# Allegro board A527-REF-DDR4-16X2-S8L-V2-0.brd
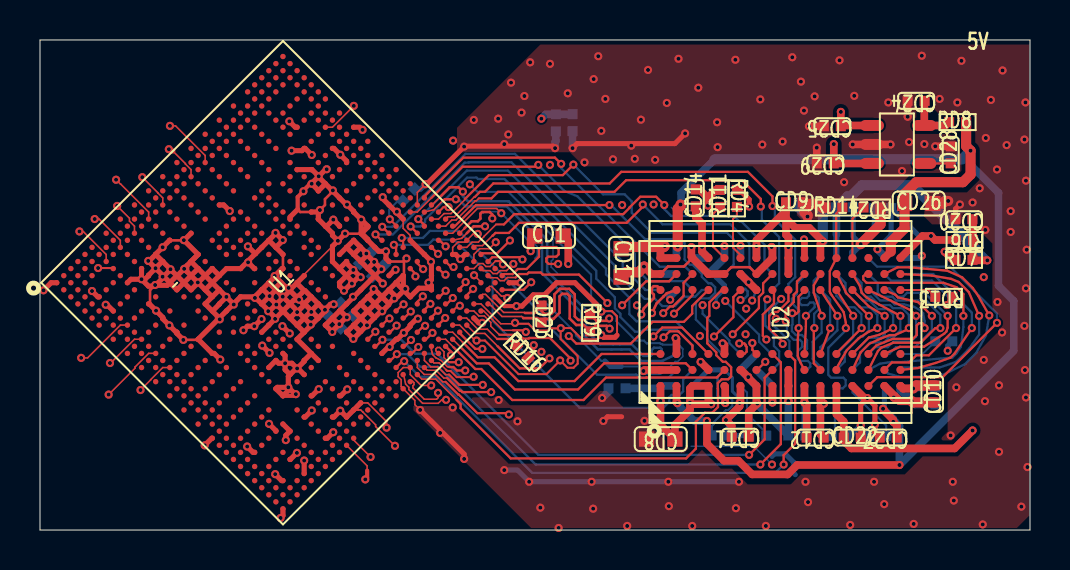
[diagram p0: board, top side]
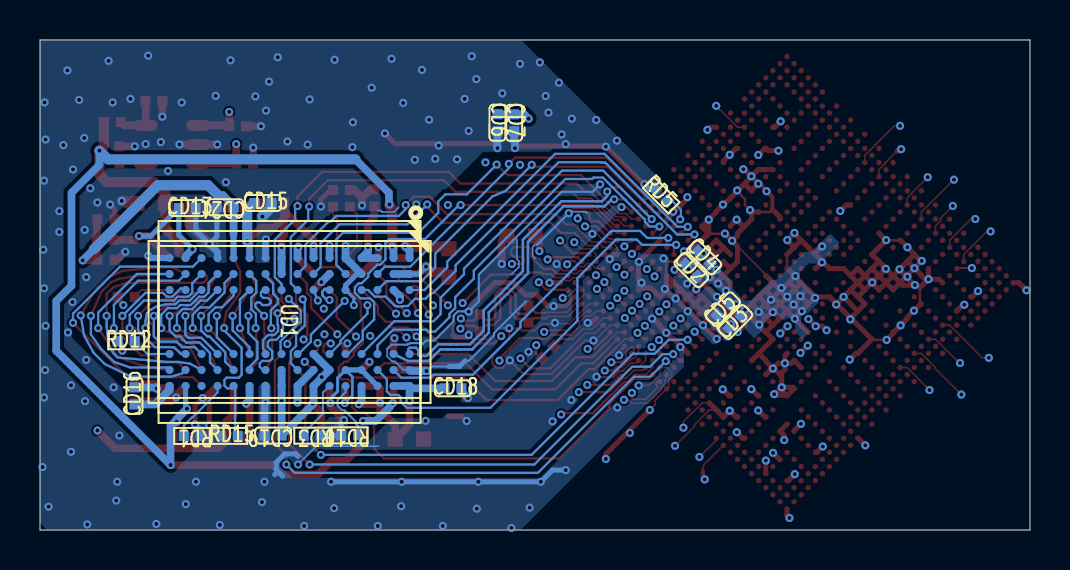
[diagram p1: board, bottom side, seen from below]

Outline 49.5 x 24.51 mm; copper layers: TOP, L2GND, L3, L4, L5GND, L6, L7GND, BOTTOM. Coordinates in mm from the lower left corner of the outline.
Outline path: 0,24.51 0,0 49.5,0 49.5,24.51 0,24.51

## Design rules (mm)
net group SBG1: nets SBG1 SBG1/GND
nets with their own width: min track width 0.102; nets SDQM0

## Placement (name value [footprint] x y rotation side)
CD1  10uF  [C0603]  25.45 14.71 0 top
CD2  2.2uF  [C0402]  16.93 12.99 225 bottom
CD3  2.2uF  [C0402]  14.74 10.41 135 bottom
CD4  2.2uF  [C0402]  16.29 13.63 225 bottom
CD5  2.2uF  [C0402]  15.35 11.04 135 bottom
CD6  2.2uF  [C0402]  26.63 20.37 270 bottom
CD7  100nF  [C0402]  25.79 20.37 270 bottom
CD8  10uF  [C0603]  31.04 4.55 180 top
CD9  2.2uF  [C0402]  37.73 16.39 0 top
CD10  2.2uF  [C0402]  44.75 6.81 90 top
CD11  4.7uF  [C0402]  35.01 4.67 180 top
CD12  4.7uF  [C0402]  38.76 4.62 180 top
CD13  2.2uF  [C0402]  42.14 16.1 180 bottom
CD14  2.2uF  [C0402]  32.79 16.61 90 top
CD15  NC/100nF  [C0402]  38.35 16.36 180 bottom
CD16  NC/100nF  [C0402]  44.78 6.71 90 bottom
CD17  10uF  [C0603]  29.06 13.36 270 top
CD18  NC/100nF  [C0402]  28.85 7.09 180 bottom
CD19  NC/100nF  [C0402]  37.85 4.72 0 bottom
CD20  100nF  [C0402]  46.2 15.54 180 top
CD21  100nF  [C0402]  40.24 16.14 0 bottom
CD22  2.2uF  [C0402]  40.61 4.62 0 top
CD23  NC/2.2pF  [C0402]  25.08 10.8 270 top
CD24  1uF  [C0402]  43.81 21.47 180 top
CD25  1uF  [C0402]  39.62 20.2 180 top
CD26  10uF  [C0603]  43.94 16.33 0 top
CD27  100nF  [C0402]  42.42 4.62 180 top
CD28  22nF  [C0402]  45.54 18.77 90 top
CD29  NC/100nF  [C0402]  39.27 18.34 180 top
NOREF  -  []  49.5 0 90 top
NOREF#2  -  []  0 24.51 0 top
RD1  1K  [R0402]  41.89 4.71 0 bottom
RD2  1K  [R0402]  41.61 16.13 180 top
RD3  240R-1%  [R0402]  35.89 4.72 0 bottom
RD4  240R-1%  [R0402]  34.85 16.59 270 top
RD5  120R-1%  [R0402]  18.44 16.75 225 bottom
RD6  2K-1%  [R0402]  46.23 14.51 180 top
RD7  2K-1%  [R0402]  46.2 13.51 0 top
RD8  0.01R-1%  [R0402]  45.88 20.4 0 top
RD9  100R  [R0402]  27.51 10.36 270 top
RD10  0R  [R0402]  34.02 4.73 0 bottom
RD11  0R  [R0402]  34.01 16.59 90 top
RD12  NC/0R  [R0402]  45.19 9.44 180 bottom
RD13  NC/0R  [R0402]  45.2 11.66 180 top
RD14  0R  [R0402]  39.7 16.13 0 top
RD15  0R  [R0402]  40.04 4.71 180 bottom
RD16  NC/0R  [R0402]  24.12 8.9 315 top
U1  A527  [BGA664P50B1700_1700H180]  12.15 12.37 45 top
UD1  DDR4-FBGA96  [BGA96P80B1000_1400H120]  37.03 10.41 270 bottom
UD2  DDR4-FBGA96  [BGA96P80B1000_1400H120]  37.03 10.41 90 top
UD3  BL9193-2.5BA  [SOT23-5]  42.85 19.29 0 top

## Library data of the parts
CD1-CD29 = C-C0402
RD1-RD15 = R-R0402-1%
RD16 = R-R0402-1%: signal model: R-R0402-1%_R0402_NC/0R_NC/0R
U1 = A527
UD1 UD2 = DDR4-FBGA96
UD3 = RT9050_0

## Footprints (pads in the part's own frame, mm; a bottom-side part is the same pattern mirrored in y, then rotated)
BGA96P80B1000_1400H120
  round 0.4 smd: A1(-3.2,6) A2(-2.4,6) A3(-1.6,6) A7(1.6,6) A8(2.4,6) A9(3.2,6) B1(-3.2,5.2) B2(-2.4,5.2) B3(-1.6,5.2) B7(1.6,5.2) B8(2.4,5.2) B9(3.2,5.2) C1(-3.2,4.4) C2(-2.4,4.4) C3(-1.6,4.4) C7(1.6,4.4) C8(2.4,4.4) C9(3.2,4.4) D1(-3.2,3.6) D2(-2.4,3.6) D3(-1.6,3.6) D7(1.6,3.6) D8(2.4,3.6) D9(3.2,3.6) E1(-3.2,2.8) E2(-2.4,2.8) E3(-1.6,2.8) E7(1.6,2.8) E8(2.4,2.8) E9(3.2,2.8) F1(-3.2,2) F2(-2.4,2) F3(-1.6,2) F7(1.6,2) F8(2.4,2) F9(3.2,2) G1(-3.2,1.2) G2(-2.4,1.2) G3(-1.6,1.2) G7(1.6,1.2) G8(2.4,1.2) G9(3.2,1.2) H1(-3.2,0.4) H2(-2.4,0.4) H3(-1.6,0.4) H7(1.6,0.4) H8(2.4,0.4) H9(3.2,0.4) J1(-3.2,-0.4) J2(-2.4,-0.4) J3(-1.6,-0.4) J7(1.6,-0.4) J8(2.4,-0.4) J9(3.2,-0.4) K1(-3.2,-1.2) K2(-2.4,-1.2) K3(-1.6,-1.2) K7(1.6,-1.2) K8(2.4,-1.2) K9(3.2,-1.2) L1(-3.2,-2) L2(-2.4,-2) L3(-1.6,-2) L7(1.6,-2) L8(2.4,-2) L9(3.2,-2) M1(-3.2,-2.8) M2(-2.4,-2.8) M3(-1.6,-2.8) M7(1.6,-2.8) M8(2.4,-2.8) M9(3.2,-2.8) N1(-3.2,-3.6) N2(-2.4,-3.6) N3(-1.6,-3.6) N7(1.6,-3.6) N8(2.4,-3.6) N9(3.2,-3.6) P1(-3.2,-4.4) P2(-2.4,-4.4) P3(-1.6,-4.4) P7(1.6,-4.4) P8(2.4,-4.4) P9(3.2,-4.4) R1(-3.2,-5.2) R2(-2.4,-5.2) R3(-1.6,-5.2) R7(1.6,-5.2) R8(2.4,-5.2) R9(3.2,-5.2) T1(-3.2,-6) T2(-2.4,-6) T3(-1.6,-6) T7(1.6,-6) T8(2.4,-6) T9(3.2,-6)
BGA664P50B1700_1700H180
  round 0.27 smd: A1(-8,8) A2(-7.5,8) A3(-7,8) A4(-6.5,8) A5(-6,8) A6(-5.5,8) A8(-4.5,8) A10(-3.5,8) A12(-2.5,8) A14(-1.5,8) A16(-0.5,8) A18(0.5,8) A20(1.5,8) A22(2.5,8) A24(3.5,8) A26(4.5,8) A28(5.5,8) A29(6,8) A30(6.5,8) A31(7,8) A32(7.5,8) A33(8,8) AA1(-8,-2) AA2(-7.5,-2) AA3(-7,-2) AA4(-6.5,-2) AA5(-6,-2) AA6(-5.5,-2) AA7(-5,-2) AA9(-4,-2) AA12(-2.5,-2) AA13(-2,-2) AA15(-1,-2) AA16(-0.5,-2) AA18(0.5,-2) AA19(1,-2) AA21(2,-2) AA22(2.5,-2) AA24(3.5,-2) AA26(4.5,-2) AA27(5,-2) AA28(5.5,-2) AA29(6,-2) AA30(6.5,-2) AA31(7,-2) AA32(7.5,-2) AA33(8,-2) AB2(-7.5,-2.5) AB3(-7,-2.5) AB9(-4,-2.5) AB10(-3.5,-2.5) AB11(-3,-2.5) AB12(-2.5,-2.5) AB13(-2,-2.5) AB14(-1.5,-2.5) AB15(-1,-2.5) AB17(0,-2.5) AB24(3.5,-2.5) AB32(7.5,-2.5) AB33(8,-2.5) AC1(-8,-3) AC2(-7.5,-3) AC3(-7,-3) AC4(-6.5,-3) AC5(-6,-3) AC6(-5.5,-3) AC7(-5,-3) AC9(-4,-3) AC15(-1,-3) AC17(0,-3) AC18(0.5,-3) AC19(1,-3) AC20(1.5,-3) AC22(2.5,-3) AC24(3.5,-3) AC26(4.5,-3) AC27(5,-3) AC28(5.5,-3) AC29(6,-3) AC30(6.5,-3) AC31(7,-3) AC32(7.5,-3) AC33(8,-3) AD1(-8,-3.5) AD2(-7.5,-3.5) AD9(-4,-3.5) AD11(-3,-3.5) AD13(-2,-3.5) AD14(-1.5,-3.5) AD15(-1,-3.5) AD20(1.5,-3.5) AD21(2,-3.5) AD22(2.5,-3.5) AD25(4,-3.5) AD32(7.5,-3.5) AD33(8,-3.5) AE1(-8,-4) AE2(-7.5,-4) AE3(-7,-4) AE4(-6.5,-4) AE5(-6,-4) AE6(-5.5,-4) AE7(-5,-4) AE9(-4,-4) AE11(-3,-4) AE12(-2.5,-4) AE13(-2,-4) AE14(-1.5,-4) AE16(-0.5,-4) AE18(0.5,-4) AE19(1,-4) AE20(1.5,-4) AE21(2,-4) AE22(2.5,-4) AE23(3,-4) AE24(3.5,-4) AE25(4,-4) AE26(4.5,-4) AE27(5,-4) AE28(5.5,-4) AE29(6,-4) AE30(6.5,-4) AE31(7,-4) AE32(7.5,-4) AE33(8,-4) AF1(-8,-4.5) AF2(-7.5,-4.5) AF32(7.5,-4.5) AF33(8,-4.5) AG1(-8,-5) AG2(-7.5,-5) AG3(-7,-5) AG4(-6.5,-5) AG5(-6,-5) AG6(-5.5,-5) AG7(-5,-5) AG9(-4,-5) AG11(-3,-5) AG13(-2,-5) AG15(-1,-5) AG17(0,-5) AG19(1,-5) AG21(2,-5) AG23(3,-5) AG25(4,-5) AG28(5.5,-5) AG29(6,-5) AG30(6.5,-5) AG31(7,-5) AG32(7.5,-5) AG33(8,-5) AH1(-8,-5.5) AH2(-7.5,-5.5) AH7(-5,-5.5) AH9(-4,-5.5) AH11(-3,-5.5) AH13(-2,-5.5) AH15(-1,-5.5) AH17(0,-5.5) AH19(1,-5.5) AH21(2,-5.5) AH23(3,-5.5) AH25(4,-5.5) AH27(5,-5.5) AH32(7.5,-5.5) AH33(8,-5.5) AJ1(-8,-6) AJ2(-7.5,-6) AJ3(-7,-6) AJ4(-6.5,-6) AJ5(-6,-6) AJ7(-5,-6) AJ9(-4,-6) AJ11(-3,-6) AJ13(-2,-6) AJ15(-1,-6) AJ17(0,-6) AJ19(1,-6) AJ21(2,-6) AJ23(3,-6) AJ25(4,-6) AJ27(5,-6) AJ30(6.5,-6) AJ31(7,-6) AJ32(7.5,-6) AJ33(8,-6) AK1(-8,-6.5) AK2(-7.5,-6.5) AK5(-6,-6.5) AK7(-5,-6.5) AK9(-4,-6.5) AK11(-3,-6.5) AK13(-2,-6.5) AK15(-1,-6.5) AK17(0,-6.5) AK19(1,-6.5) AK21(2,-6.5) AK23(3,-6.5) AK25(4,-6.5) AK27(5,-6.5) AK29(6,-6.5) AK32(7.5,-6.5) AK33(8,-6.5) AL1(-8,-7) AL2(-7.5,-7) AL3(-7,-7) AL5(-6,-7) AL7(-5,-7) AL9(-4,-7) AL11(-3,-7) AL12(-2.5,-7) AL13(-2,-7) AL14(-1.5,-7) AL15(-1,-7) AL16(-0.5,-7) AL17(0,-7) AL19(1,-7) AL21(2,-7) AL23(3,-7) AL25(4,-7) AL27(5,-7) AL29(6,-7) AL31(7,-7) AL32(7.5,-7) AL33(8,-7) AM1(-8,-7.5) AM2(-7.5,-7.5) AM3(-7,-7.5) AM4(-6.5,-7.5) AM5(-6,-7.5) AM6(-5.5,-7.5) AM7(-5,-7.5) AM8(-4.5,-7.5) AM9(-4,-7.5) AM10(-3.5,-7.5) AM11(-3,-7.5) AM12(-2.5,-7.5) AM13(-2,-7.5) AM14(-1.5,-7.5) AM15(-1,-7.5) AM16(-0.5,-7.5) AM17(0,-7.5) AM18(0.5,-7.5) AM19(1,-7.5) AM20(1.5,-7.5) AM21(2,-7.5) AM22(2.5,-7.5) AM23(3,-7.5) AM24(3.5,-7.5) AM25(4,-7.5) AM26(4.5,-7.5) AM27(5,-7.5) AM28(5.5,-7.5) AM29(6,-7.5) AM30(6.5,-7.5) AM31(7,-7.5) AM32(7.5,-7.5) AM33(8,-7.5) AN1(-8,-8) AN2(-7.5,-8) AN3(-7,-8) AN4(-6.5,-8) AN5(-6,-8) AN6(-5.5,-8) AN7(-5,-8) AN8(-4.5,-8) AN9(-4,-8) AN10(-3.5,-8) AN11(-3,-8) AN13(-2,-8) AN15(-1,-8) AN17(0,-8) AN18(0.5,-8) AN19(1,-8) AN20(1.5,-8) AN21(2,-8) AN22(2.5,-8) AN23(3,-8) AN24(3.5,-8) AN25(4,-8) AN26(4.5,-8) AN27(5,-8) AN28(5.5,-8) AN29(6,-8) AN30(6.5,-8) AN31(7,-8) AN32(7.5,-8) AN33(8,-8) B1(-8,7.5) B2(-7.5,7.5) B3(-7,7.5) B4(-6.5,7.5) B5(-6,7.5) B6(-5.5,7.5) B7(-5,7.5) B8(-4.5,7.5) B9(-4,7.5) B10(-3.5,7.5) B11(-3,7.5) B12(-2.5,7.5) B13(-2,7.5) B14(-1.5,7.5) B15(-1,7.5) B16(-0.5,7.5) B17(0,7.5) B18(0.5,7.5) B19(1,7.5) B20(1.5,7.5) B21(2,7.5) B22(2.5,7.5) B23(3,7.5) B24(3.5,7.5) B25(4,7.5) B26(4.5,7.5) B27(5,7.5) B28(5.5,7.5) B29(6,7.5) B30(6.5,7.5) B31(7,7.5) B32(7.5,7.5) B33(8,7.5) C1(-8,7) C2(-7.5,7) C3(-7,7) C4(-6.5,7) C6(-5.5,7) C7(-5,7) C8(-4.5,7) C9(-4,7) C10(-3.5,7) C11(-3,7) C12(-2.5,7) C13(-2,7) C14(-1.5,7) C15(-1,7) C16(-0.5,7) C17(0,7) C18(0.5,7) C19(1,7) C20(1.5,7) C21(2,7) C22(2.5,7) C23(3,7) C24(3.5,7) C25(4,7) C26(4.5,7) C27(5,7) C28(5.5,7) C29(6,7) C30(6.5,7) C31(7,7) C32(7.5,7) C33(8,7) D1(-8,6.5) D2(-7.5,6.5) D6(-5.5,6.5) D8(-4.5,6.5) D10(-3.5,6.5) D12(-2.5,6.5) D14(-1.5,6.5) D16(-0.5,6.5) D18(0.5,6.5) D20(1.5,6.5) D22(2.5,6.5) D24(3.5,6.5) D26(4.5,6.5) D28(5.5,6.5) D32(7.5,6.5) D33(8,6.5) E1(-8,6) E2(-7.5,6) E3(-7,6) E4(-6.5,6) E5(-6,6) E6(-5.5,6) E8(-4.5,6) E10(-3.5,6) E12(-2.5,6) E14(-1.5,6) E16(-0.5,6) E18(0.5,6) E20(1.5,6) E22(2.5,6) E24(3.5,6) E26(4.5,6) E28(5.5,6) E29(6,6) E30(6.5,6) E31(7,6) E32(7.5,6) E33(8,6) F1(-8,5.5) F2(-7.5,5.5) F6(-5.5,5.5) F8(-4.5,5.5) F10(-3.5,5.5) F12(-2.5,5.5) F14(-1.5,5.5) F16(-0.5,5.5) F18(0.5,5.5) F20(1.5,5.5) F22(2.5,5.5) F24(3.5,5.5) F26(4.5,5.5) F28(5.5,5.5) F32(7.5,5.5) F33(8,5.5) G1(-8,5) G2(-7.5,5) G3(-7,5) G4(-6.5,5) G5(-6,5) G6(-5.5,5) G8(-4.5,5) G10(-3.5,5) G12(-2.5,5) G14(-1.5,5) G16(-0.5,5) G18(0.5,5) G20(1.5,5) G22(2.5,5) G24(3.5,5) G26(4.5,5) G28(5.5,5) G29(6,5) G30(6.5,5) G31(7,5) G32(7.5,5) G33(8,5) H2(-7.5,4.5) H3(-7,4.5) H24(3.5,4.5) H31(7,4.5) H32(7.5,4.5) J1(-8,4) J2(-7.5,4) J3(-7,4) J4(-6.5,4) J5(-6,4) J6(-5.5,4) J7(-5,4) J9(-4,4) J10(-3.5,4) J12(-2.5,4) J13(-2,4) J15(-1,4) J16(-0.5,4) J17(0,4) J18(0.5,4) J19(1,4) J21(2,4) J22(2.5,4) J23(3,4) J26(4.5,4) J28(5.5,4) J29(6,4) J30(6.5,4) J31(7,4) J32(7.5,4) J33(8,4) K2(-7.5,3.5) K3(-7,3.5) K9(-4,3.5) K10(-3.5,3.5) K11(-3,3.5) K12(-2.5,3.5) K13(-2,3.5) K15(-1,3.5) K16(-0.5,3.5) K19(1,3.5) K21(2,3.5) K22(2.5,3.5) K24(3.5,3.5) K25(4,3.5) K26(4.5,3.5) K31(7,3.5) K32(7.5,3.5) L1(-8,3) L2(-7.5,3) L3(-7,3) L4(-6.5,3) L5(-6,3) L6(-5.5,3) L7(-5,3) L9(-4,3) L10(-3.5,3) L12(-2.5,3) L13(-2,3) L15(-1,3) L16(-0.5,3) L17(0,3) L18(0.5,3) L19(1,3) L21(2,3) L22(2.5,3) L24(3.5,3) L26(4.5,3) L27(5,3) L28(5.5,3) L29(6,3) L30(6.5,3) L31(7,3) L32(7.5,3) L33(8,3) M2(-7.5,2.5) M3(-7,2.5) M10(-3.5,2.5) M13(-2,2.5) M16(-0.5,2.5) M18(0.5,2.5) M19(1,2.5) M21(2,2.5) M22(2.5,2.5) M31(7,2.5) M32(7.5,2.5) N1(-8,2) N2(-7.5,2) N3(-7,2) N4(-6.5,2) N5(-6,2) N6(-5.5,2) N7(-5,2) N9(-4,2) N10(-3.5,2) N12(-2.5,2) N13(-2,2) N15(-1,2) N18(0.5,2) N19(1,2) N21(2,2) N22(2.5,2) N24(3.5,2) N26(4.5,2) N27(5,2) N28(5.5,2) N29(6,2) N30(6.5,2) N31(7,2) N32(7.5,2) N33(8,2) P2(-7.5,1.5) P3(-7,1.5) P9(-4,1.5) P11(-3,1.5) P13(-2,1.5) P16(-0.5,1.5) P18(0.5,1.5) P19(1,1.5) P21(2,1.5) P22(2.5,1.5) P24(3.5,1.5) P31(7,1.5) P32(7.5,1.5) R1(-8,1) R2(-7.5,1) R3(-7,1) R4(-6.5,1) R5(-6,1) R6(-5.5,1) R7(-5,1) R11(-3,1) R13(-2,1) R15(-1,1) R17(0,1) R18(0.5,1) R19(1,1) R22(2.5,1) R24(3.5,1) R26(4.5,1) R27(5,1) R28(5.5,1) R29(6,1) R30(6.5,1) R31(7,1) R32(7.5,1) R33(8,1) T2(-7.5,0.5) T3(-7,0.5) T9(-4,0.5) T11(-3,0.5) T13(-2,0.5) T15(-1,0.5) T16(-0.5,0.5) T18(0.5,0.5) T19(1,0.5) T21(2,0.5) T22(2.5,0.5) T24(3.5,0.5) T31(7,0.5) T32(7.5,0.5) U1(-8,0) U2(-7.5,0) U3(-7,0) U4(-6.5,0) U5(-6,0) U6(-5.5,0) U7(-5,0) U8(-4.5,0) U10(-3.5,0) U12(-2.5,0) U13(-2,0) U14(-1.5,0) U16(-0.5,0) U18(0.5,0) U19(1,0) U21(2,0) U22(2.5,0) U25(4,0) U26(4.5,0) U27(5,0) U28(5.5,0) U29(6,0) U30(6.5,0) U31(7,0) U32(7.5,0) U33(8,0) V2(-7.5,-0.5) V3(-7,-0.5) V18(0.5,-0.5) V19(1,-0.5) V31(7,-0.5) V32(7.5,-0.5) W1(-8,-1) W2(-7.5,-1) W3(-7,-1) W4(-6.5,-1) W5(-6,-1) W6(-5.5,-1) W7(-5,-1) W9(-4,-1) W10(-3.5,-1) W12(-2.5,-1) W13(-2,-1) W15(-1,-1) W16(-0.5,-1) W19(1,-1) W21(2,-1) W22(2.5,-1) W23(3,-1) W24(3.5,-1) W25(4,-1) W27(5,-1) W28(5.5,-1) W29(6,-1) W30(6.5,-1) W31(7,-1) W32(7.5,-1) W33(8,-1) Y2(-7.5,-1.5) Y3(-7,-1.5) Y9(-4,-1.5) Y10(-3.5,-1.5) Y12(-2.5,-1.5) Y13(-2,-1.5) Y15(-1,-1.5) Y18(0.5,-1.5) Y19(1,-1.5) Y21(2,-1.5) Y22(2.5,-1.5) Y23(3,-1.5) Y24(3.5,-1.5) Y26(4.5,-1.5) Y31(7,-1.5) Y32(7.5,-1.5)
C0402
  rect 0.5x0.5 smd: 1(-0.425,0) 2(0.425,0)
C0603
  rect 0.76x0.76 smd: 1(-0.71,0) 2(0.71,0)
R0402
  rect 0.5x0.5 smd: 1(-0.425,0) 2(0.425,0)
SOT23-5
  oval 1.2x0.55 smd: 1(-1.246,0.95) 2(-1.246,0) 3(-1.246,-0.95) 4(1.373,-0.95) 5(1.373,0.95)

## Nets
GND: CD1.2 CD2.2 CD3.2 CD4.2 CD5.2 CD6.2 CD7.2 CD8.2 CD9.2 CD10.2 CD11.2 CD12.2 CD13.2 CD14.2 CD15.2 CD16.2 CD17.2 CD18.2 CD19.2 CD20.2 CD21.2 CD22.2 CD24.2 CD25.2 CD26.2 CD27.2 CD28.2 CD29.2 RD1.1 RD2.1 RD3.1 RD4.1 RD5.1 RD7.1 RD10.2 RD11.2 RD12.1 RD13.1 RD14.1 RD15.1 U1.A1(GND0) U1.AA15(GND87) U1.AA16(GND88) U1.AA18(GND89) U1.AA21(GND90) U1.AA22(GND91) U1.AA26(GND92) U1.AA30(GND93) U1.AA32(GND94) U1.AB10(GND95) U1.AB11(GND96) U1.AB12(GND97) U1.AB14(GND98) U1.AB15(GND99) U1.AB17(GND100) U1.AC1(GND101) U1.AC26(GND102) U1.AC29(GND103) U1.AC33(GND104) U1.AD9(GND105) U1.AD11(GND106) U1.AD13(GND107) U1.AD14(GND108) U1.AD20(GND109) U1.AD21(GND110) U1.AD22(GND111) U1.AE9(GND112) U1.AE12(GND113) U1.AE14(GND114) U1.AE18(GND115) U1.AE19(GND116) U1.AE20(GND117) U1.AE21(GND118) U1.AE22(GND119) U1.AE23(GND120) U1.AE24(GND121) U1.AE25(GND122) U1.AE26(GND123) U1.AE29(GND124) U1.AE32(GND125) U1.AG3(GND126) U1.AG6(GND127) U1.AG7(GND128) U1.AG11(GND129) U1.AG25(GND130) U1.AG28(GND131) U1.AG31(GND132) U1.AG33(GND133) U1.AH7(GND134) U1.AH9(GND135) U1.AH27(GND136) U1.AH32(GND137) U1.AJ13(GND138) U1.AJ19(GND139) U1.AJ21(GND140) U1.AJ23(GND141) U1.AK5(GND142) U1.AK11(GND143) U1.AK32(GND144) U1.AL3(GND145) U1.AL9(GND146) U1.AL12(GND147) U1.AL13(GND148) U1.AL14(GND149) U1.AM5(GND150) U1.AM20(GND151) U1.AM26(GND152) U1.AM29(GND153) U1.AN1(GND154) U1.AN10(GND155) U1.AN11(GND156) U1.AN18(GND157) U1.AN22(GND158) U1.AN24(GND159) U1.AN28(GND160) U1.AN31(GND161) U1.AN33(GND162) U1.C6(GND1) U1.C8(GND2) U1.C10(GND3) U1.C12(GND4) U1.C14(GND5) U1.C18(GND6) U1.C20(GND7) U1.D6(GND8) U1.E3(GND9) U1.F6(GND10) U1.F8(GND11) U1.F10(GND12) U1.F12(GND13) U1.G3(GND14) U1.G8(GND15) U1.G10(GND16) U1.G14(GND17) U1.G18(GND18) U1.G29(GND19) U1.J3(GND20) U1.J6(GND21) U1.J9(GND22) U1.J10(GND23) U1.J12(GND24) U1.J13(GND25) U1.J28(GND26) U1.J31(GND27) U1.K9(GND28) U1.K10(GND29) U1.K11(GND30) U1.K12(GND31) U1.K26(GND32) U1.L3(GND33) U1.L6(GND34) U1.L10(GND35) U1.L12(GND36) U1.L13(GND37) U1.L27(GND38) U1.L30(GND39) U1.L33(GND40) U1.M13(GND41) U1.N3(GND42) U1.N6(GND43) U1.N10(GND44) U1.N12(GND45) U1.N15(GND46) U1.N18(GND47) U1.N19(GND48) U1.N22(GND49) U1.N26(GND50) U1.N27(GND51) U1.N30(GND52) U1.P11(GND53) U1.P16(GND54) U1.P19(GND55) U1.P24(GND56) U1.R3(GND57) U1.R7(GND58) U1.R11(GND59) U1.R13(GND60) U1.R19(GND61) U1.R24(GND62) U1.R27(GND63) U1.T15(GND64) U1.T16(GND65) U1.T18(GND66) U1.T24(GND67) U1.U7(GND68) U1.U14(GND69) U1.U16(GND70) U1.U25(GND71) U1.U27(GND72) U1.V18(GND73) U1.V19(GND74) U1.W12(GND75) U1.W13(GND76) U1.W15(GND77) U1.W16(GND78) U1.W22(GND79) U1.W27(GND80) U1.W30(GND81) U1.Y15(GND82) U1.Y18(GND83) U1.Y22(GND84) U1.Y23(GND85) U1.Y26(GND86) UD1.A2(VSSQ1) UD1.A8(VSSQ2) UD1.B2(VSS1) UD1.C9(VSSQ3) UD1.D2(VSSQ4) UD1.D8(VSSQ5) UD1.E1(VSS2) UD1.E3(VSSQ6) UD1.E8(VSSQ7) UD1.F1(VSSQ8) UD1.G8(VSS4) UD1.H1(VSSQ9) UD1.H9(VSSQ10) UD1.K1(VSS5) UD1.K9(VSS6) UD1.N1(VSS8) UD1.T1(VSS9) UD2.A2(VSSQ1) UD2.A8(VSSQ2) UD2.B2(VSS1) UD2.C9(VSSQ3) UD2.D2(VSSQ4) UD2.D8(VSSQ5) UD2.E1(VSS2) UD2.E3(VSSQ6) UD2.E8(VSSQ7) UD2.F1(VSSQ8) UD2.G8(VSS4) UD2.H1(VSSQ9) UD2.H9(VSSQ10) UD2.K1(VSS5) UD2.K9(VSS6) UD2.N1(VSS8) UD2.T1(VSS9) UD3.2(GND)
SBG1/GND: RD14.2 RD15.2 RD16.2 UD1.M9(VSS7) UD2.M9(VSS7)
VCC25-DRAM: CD26.1 CD27.1 RD8.2 UD1.B1(VPP1) UD1.R9(VPP2) UD2.B1(VPP1) UD2.R9(VPP2)
VCC-DRAM: CD1.1 CD2.1 CD3.1 CD4.1 CD5.1 CD8.1 CD9.1 CD10.1 CD11.1 CD12.1 CD13.1 CD14.1 CD15.1 CD16.1 CD17.1 CD18.1 CD19.1 RD6.2 U1.AA24(VCC-DRAM4) U1.AB24(VCC-DRAM5) U1.AC17(VCC-DRAML0) U1.AC18(VCC-DRAML1) U1.AC19(VCC-DRAML2) U1.AC20(VCC-DRAML3) U1.AC22(VCC-DRAML4) U1.AC24(VCC-DRAM6) U1.W23(VCC-DRAM0) U1.W24(VCC-DRAM1) U1.W25(VCC-DRAM2) U1.Y24(VCC-DRAM3) UD1.A1(VDDQ1) UD1.A9(VDDQ2) UD1.B3(VDD1) UD1.B9(VDD2) UD1.C1(VDDQ3) UD1.D1(VDD3) UD1.D9(VDDQ4) UD1.F2(VDDQ5) UD1.F8(VDDQ6) UD1.G1(VDDQ7) UD1.G7(VDD4) UD1.G9(VDDQ8) UD1.J1(VDD5) UD1.J2(VDDQ9) UD1.J8(VDDQ10) UD1.J9(VDD6) UD1.L1(VDD7) UD1.L9(VDD8) UD1.R1(VDD9) UD1.T9(VDD10) UD2.A1(VDDQ1) UD2.A9(VDDQ2) UD2.B3(VDD1) UD2.B9(VDD2) UD2.C1(VDDQ3) UD2.D1(VDD3) UD2.D9(VDDQ4) UD2.F2(VDDQ5) UD2.F8(VDDQ6) UD2.G1(VDDQ7) UD2.G7(VDD4) UD2.G9(VDDQ8) UD2.J1(VDD5) UD2.J2(VDDQ9) UD2.J8(VDDQ10) UD2.J9(VDD6) UD2.L1(VDD7) UD2.L9(VDD8) UD2.R1(VDD9) UD2.T9(VDD10)
VDD18-DRAM: CD6.1 CD7.1 U1.AD25(VDD18-DRAM)
717-BLDO2: CD29.1 UD3.3(EN)
PS: CD25.1 UD3.1(VIN)
SA0: U1.AL31(SA12) UD1.P3(A0) UD2.P3(A0)
SA1: U1.AJ31(SA9) UD1.P7(A1) UD2.P7(A1)
SA2: U1.AK33(SA0) UD1.R3(A2) UD2.R3(A2)
SA3: U1.AL27(SA3) UD1.N7(A3) UD2.N7(A3)
SA4: U1.AH25(SA4) UD1.N3(A4) UD2.N3(A4)
SA5: U1.AJ25(SBA1) UD1.P8(A5) UD2.P8(A5)
SA6: U1.AN26(SBG0) UD1.P2(A6) UD2.P2(A6)
SA7: U1.AJ32(SA11) UD1.R8(A7) UD2.R8(A7)
SA8: U1.AL25(SA8) UD1.R2(A8) UD2.R2(A8)
SA9: U1.AG29(SA10) UD1.R7(A9) UD2.R7(A9)
SA10: U1.AK29(SA13) UD1.M3(A10) UD2.M3(A10)
SA11: U1.AJ33(SA2) UD1.T2(A11) UD2.T2(A11)
SA12: U1.AM33(SA7) UD1.M7(A12) UD2.M7(A12)
SA13: U1.AG30(SA1) UD1.T8(A13) UD2.T8(A13)
SACT: U1.AL29(SACT) UD1.L3(ACT) UD2.L3(ACT)
SBA0: U1.AK25(SBA0) UD1.N2(BA0) UD2.N2(BA0)
SBA1: U1.AK27(SA5) UD1.N8(BA1) UD2.N8(BA1)
SBG0: U1.AN27(SA6) UD1.M2(BG0) UD2.M2(BG0)
SBG1: RD16.1 U1.AM27(SBG1)
SCAS: U1.AM28(SA14) UD1.M8(A15/CAS) UD2.M8(A15/CAS)
SCKE0: U1.AM31(SCKE0) UD1.K2(CKE0) UD2.K2(CKE0)
SCKN: CD23.2 RD9.2 U1.AN30(SCKN) UD1.K8(CK#) UD2.K8(CK#)
SCKP: CD23.1 RD9.1 U1.AM30(SCKP) UD1.K7(CK) UD2.K7(CK)
SCS0: U1.AN32(SCS0) UD1.L7(CS0) UD2.L7(CS0)
SDQ0: U1.AE28(SDQ0) UD1.J7(DQ7)
SDQ1: U1.AE27(SDQ1) UD1.F7(DQ1)
SDQ2: U1.AG32(SDQ2) UD1.H2(DQ4)
SDQ3: U1.AH33(SDQ3) UD1.G2(DQ0)
SDQ4: U1.AE30(SDQ4) UD1.H8(DQ5)
SDQ5: U1.AD32(SDQ5) UD1.H3(DQ2)
SDQ6: U1.AE31(SDQ6) UD1.H7(DQ3)
SDQ7: U1.AD33(SDQ7) UD1.J3(DQ6)
SDQ8: U1.AC27(SDQ8) UD1.C8(DQ13)
SDQ9: U1.AC28(SDQ9) UD1.B8(DQ9)
SDQ10: U1.AC30(SDQ10) UD1.C7(DQ11)
SDQ11: U1.AC31(SDQ11) UD1.D7(DQ15)
SDQ12: U1.AA33(SDQ12) UD1.C2(DQ12)
SDQ13: U1.AA31(SDQ13) UD1.C3(DQ10)
SDQ14: U1.AA28(SDQ14) UD1.A3(DQ8)
SDQ15: U1.AA27(SDQ15) UD1.D3(DQ14)
SDQ16: U1.AM25(SDQ16) UD2.A3(DQ8)
SDQ17: U1.AN25(SDQ17) UD2.C2(DQ12)
SDQ18: U1.AH23(SDQ18) UD2.C7(DQ11)
SDQ19: U1.AK23(SDQ19) UD2.C8(DQ13)
SDQ20: U1.AL23(SDQ20) UD2.B8(DQ9)
SDQ21: U1.AM22(SDQ21) UD2.D3(DQ14)
SDQ22: U1.AN21(SDQ22) UD2.C3(DQ10)
SDQ23: U1.AG21(SDQ23) UD2.D7(DQ15)
SDQ24: U1.AG19(SDQ24) UD2.J7(DQ7)
SDQ25: U1.AH19(SDQ25) UD2.H2(DQ4)
SDQ26: U1.AK19(SDQ26) UD2.H3(DQ2)
SDQ27: U1.AL19(SDQ27) UD2.J3(DQ6)
SDQ28: U1.AM21(SDQ28) UD2.H8(DQ5)
SDQ29: U1.AL21(SDQ29) UD2.G2(DQ0)
SDQ30: U1.AK21(SDQ30) UD2.F7(DQ1)
SDQ31: U1.AH21(SDQ31) UD2.H7(DQ3)
SDQM0: U1.AE33(SDQM0) UD1.E7(DM0)
SDQM1: U1.AC32(SDQM1) UD1.E2(DM1)
SDQM2: U1.AM24(SDQM2) UD2.E2(DM1)
SDQM3: U1.AN20(SDQM3) UD2.E7(DM0)
SDQS0N: U1.AF33(SDQS0N) UD1.F3(DQS0#)
SDQS0P: U1.AF32(SDQS0P) UD1.G3(DQS0)
SDQS1N: U1.AB33(SDQS1N) UD1.A7(DQS1#)
SDQS1P: U1.AB32(SDQS1P) UD1.B7(DQS1)
SDQS2N: U1.AN23(SDQS2N) UD2.A7(DQS1#)
SDQS2P: U1.AM23(SDQS2P) UD2.B7(DQS1)
SDQS3N: U1.AN19(SDQS3N) UD2.F3(DQS0#)
SDQS3P: U1.AM19(SDQS3P) UD2.G3(DQS0)
SODT0: U1.AL32(SODT0) UD1.K3(ODT0) UD2.K3(ODT0)
SRAS: U1.AJ27(SA16) UD1.L8(A16/RAS) UD2.L8(A16/RAS)
SRST: U1.AG23(SRST) UD1.P1(RESET) UD2.P1(RESET)
STEN1: RD1.2 UD1.N9(TEN)
STEN2: RD2.2 UD2.N9(TEN)
SVREF: CD20.1 CD21.1 CD22.1 RD6.1 RD7.2 UD1.M1(VREFCA) UD2.M1(VREFCA)
SWE: U1.AN29(SA15) UD1.L2(A14/WE) UD2.L2(A14/WE)
N186294: RD5.2 U1.AA29(SZQ)
N16583990: CD28.1 UD3.4(BP)
N16583994: CD24.1 RD8.1 UD3.5(VOUT)
N16584336: RD10.1 UD1.E9(VSS3)
N16584348: RD11.1 UD2.E9(VSS3)
N16584564: RD12.2 UD1.T7(NC)
N16584572: RD13.2 UD2.T7(NC)
N16584986: RD3.2 UD1.F9(ZQ)
N16585660: RD4.2 UD2.F9(ZQ)

Pads without a net: U1 A2 A3 A4 A5 A6 A8 A10 A12 A14 A16 A18 A20 A22 A24 A26 A28 A29 A30 A31 A32 A33 AA1 AA2 AA3 AA4 AA5 AA6 AA7 AA9 AA12 AA13 AA19 AB2 AB3 AB9 AB13 AC2 AC3 AC4 AC5 AC6 AC7 AC9 AC15 AD1 AD2 AD15 AE1 AE2 AE3 AE4 AE5 AE6 AE7 AE11 AE13 AE16 AF1 AF2 AG1 AG2 AG4 AG5 AG9 AG13 AG15 AG17 AH1 AH2 AH11 AH13 AH15 AH17 AJ1 AJ2 AJ3 AJ4 AJ5 AJ7 AJ9 AJ11 AJ15 AJ17 AJ30 AK1 AK2 AK7 AK9 AK13 AK15 AK17 AL1 AL2 AL5 AL7 AL11 AL15 AL16 AL17 AL33 AM1 AM2 AM3 AM4 AM6 AM7 AM8 AM9 AM10 AM11 AM12 AM13 AM14 AM15 AM16 AM17 AM18 AM32 AN2 AN3 AN4 AN5 AN6 AN7 AN8 AN9 AN13 AN15 AN17 B1 B2 B3 B4 B5 B6 B7 B8 B9 B10 B11 B12 B13 B14 B15 B16 B17 B18 B19 B20 B21 B22 B23 B24 B25 B26 B27 B28 B29 B30 B31 B32 B33 C1 C2 C3 C4 C7 C9 C11 C13 C15 C16 C17 C19 C21 C22 C23 C24 C25 C26 C27 C28 C29 C30 C31 C32 C33 D1 D2 D8 D10 D12 D14 D16 D18 D20 D22 D24 D26 D28 D32 D33 E1 E2 E4 E5 E6 E8 E10 E12 E14 E16 E18 E20 E22 E24 E26 E28 E29 E30 E31 E32 E33 F1 F2 F14 F16 F18 F20 F22 F24 F26 F28 F32 F33 G1 G2 G4 G5 G6 G12 G16 G20 G22 G24 G26 G28 G30 G31 G32 G33 H2 H3 H24 H31 H32 J1 J2 J4 J5 J7 J15 J16 J17 J18 J19 J21 J22 J23 J26 J29 J30 J32 J33 K2 K3 K13 K15 K16 K19 K21 K22 K24 K25 K31 K32 L1 L2 L4 L5 L7 L9 L15 L16 L17 L18 L19 L21 L22 L24 L26 L28 L29 L31 L32 M2 M3 M10 M16 M18 M19 M21 M22 M31 M32 N1 N2 N4 N5 N7 N9 N13 N21 N24 N28 N29 N31 N32 N33 P2 P3 P9 P13 P18 P21 P22 P31 P32 R1 R2 R4 R5 R6 R15 R17 R18 R22 R26 R28 R29 R30 R31 R32 R33 T2 T3 T9 T11 T13 T19 T21 T22 T31 T32 U1 U2 U3 U4 U5 U6 U8 U10 U12 U13 U18 U19 U21 U22 U26 U28 U29 U30 U31 U32 U33 V2 V3 V31 V32 W1 W2 W3 W4 W5 W6 W7 W9 W10 W19 W21 W28 W29 W31 W32 W33 Y2 Y3 Y9 Y10 Y12 Y13 Y19 Y21 Y31 Y32; UD1 P9 T3; UD2 P9 T3

## Via types
v1: diameter 0.406, hole 0.203, TOP to BOTTOM, 453 vias

## Routing (per net, layer and track width the routed paths; a pad name or vN(x,y) marks a point on that pad's centre or on a via; arc(x,y) is an arc through that point)
GND: length 447.9
  TOP w0.076: U1.AL14 16.39,6.36 17.33,5.42 v1(17.33,5.12) ; U1.V19 13.21,12.78 14.62,14.19 ; 16.36,2.97 16.36,3.21 U1.AN10 ; v1(19.56,7.23) 19.06,7.23 18.51,7.77 U1.AM20 18.16,8.13 17.91,7.88 17.91,7.67 18.06,7.52 18.06,7.17 U1.AN18 18.75,6.48 18.75,6.27 v1(19.01,6) ; v1(16.53,3.65) 15.68,4.5 U1.AN11 ; v1(3.8,17.52) 4.03,17.3 4.04,17.3 5.43,15.9 U1.C12 ; v1(3.5,8.35) 3.54,8.35 4.72,9.54 U1.L3 ; v1(3.86,16.21) 4.47,15.59 4.47,15.45 4.72,15.2 U1.C10 ; 15.93,6.01 16.04,6.01 16.14,5.9 16.78,5.26 16.78,5.17 17.75,4.21 ; v1(21.83,9.48) 21.76,9.48 20.99,10.25 U1.AM26 ; 23.87,10.35 23.84,10.32 23.04,10.32 22.05,11.31 U1.AM29 ; v1(2.06,8.61) 2.38,8.61 4.02,10.25 U1.J3 ; U1.AA32 18.87,16.89 v1(19.28,17.3) ; v1(1.97,14.94) 1.99,14.92 2.18,14.92 3.31,13.78 U1.C6 ; v1(5.03,7) 5.53,7.51 5.53,7.52 6.14,8.13 U1.R3 ; v1(23.67,13.31) 23.33,12.97 23,12.97 22.86,12.83 22.65,12.83 22.51,12.97 22.15,12.97 U1.AK32 ; U1.AE32 20.64,14.84 21.88,16.08 22.83,16.08 v1(23.07,15.85) ; v1(5.12,17.65) 5.89,16.87 5.89,16.86 6.14,16.61 U1.C14 ; U1.J31 14.62,20.15 v1(15.69,21.22) ; 16,20.15 v1(16.13,20.02) ; U1.C18 7.55,18.03 7.27,18.31 7.27,18.33 6.64,18.96 ; U1.C8 4.02,14.49 2.95,15.56 v1(2.73,15.56) ; U1.AC29 18.51,14.74 18.16,15.09 U1.AA30 ; 20.31,8.01 19.96,8.36 19.7,8.36 U1.AN22 ; 20.63,13.78 20.63,14.14 20.89,14.39 20.94,14.4 21.25,14.4 U1.AG33 21.66,14.81 v1(21.89,14.81) ; U1.C20 8.26,18.73 6.78,20.22 v1(6.5,20.22) ; v1(3.43,6.77) 4.75,8.09 4.75,8.15 5.43,8.83 U1.N3
  TOP w0.102: v1(28.07,9.75) 27.85,9.54 27.11,9.54 26.55,10.1 26.05,10.1 26.03,10.08 ; 20.31,8.01 20.36,7.96 20.53,7.96 20.84,7.65 21.67,7.65 v1(21.68,7.66) ; v1(26.04,10.09) 26.03,10.09 26.03,10.08 ; v1(2.91,13.1) 3.64,13.1 U1.D6 ; 13.54,5.98 v1(13.59,5.98) ; 28.16,10.95 28.59,10.95 28.85,10.69 28.85,9.74 ; 26.03,10.08 26.03,9.55 26.89,8.7 26.89,8.32 26.68,8.12 26.38,8.12 v1(26.01,8.48) 25.32,7.8 23.93,7.8 22.25,9.48 v1(21.83,9.48) ; 26.03,10.08 26.03,10.09 25.51,10.09 25.4,9.97 24.77,9.97 24.43,10.32 23.91,10.32 23.86,10.36 v1(23.75,10.36) ; U1.F10 5.46,13.46 ; U1.AC33 20.17,16.15 v1(20.43,16.15) ; U1.AL13 15.93,6.01
  TOP w0.114: 17.75,4.21 v1(17.75,4.21)
  TOP w0.127: 18.2,13.46 18.17,13.43 17.45,13.43 ; 18.2,13.46 v1(18.33,13.59) ; 18.2,13.46 18.2,12.76 U1.AE26 ; U1.F12 7.19,14.49 v1(7.19,14.5) ; 16.06,14.82 15.26,14.82 v1(15.25,14.83) ; UD2.A8 31.4,13.18 32.2,13.18 UD2.C9 ; v1(20.55,8.74) 20.55,8.92 U1.AN24 ; 14.64,16.95 14.25,16.55 14.25,16.26 v1(14,16.01) ; UD2.G8 35.49,13.15 34.57,13.15 UD2.E8 ; v1(7.17,9.51) 7.88,9.51 7.91,9.54 ; 5.7,12.2 5.5,12 5.5,11.38 U1.J6 ; U1.T18 U1.R19 ; 12.88,16.03 13.01,15.91 U1.P24
  TOP w0.203: v1(12.79,6.8) 12.71,6.71 U1.AE9 ; 16.36,2.97 16.36,2.63 v1(16.27,2.53) ; v1(23.83,11.2) 23.22,11.2 U1.AN31 ; 13.49,17.3 13.17,16.98 v1(13.17,16.95) 12.88,16.66 12.88,16.03
  TOP w0.254: 12.88,16.03 12.5,15.65 U1.N22 ; 29.08,5.67 28.38,5.67 v1(28.17,5.45) ; U1.AE22 U1.AE23 ; U1.AE22 U1.AD22 ; U1.AE22 U1.AE21 ; U1.AE22 v1(17.11,10.94) ; U1.AE23 17.45,12.02 ; U1.AE23 17.44,11.32 ; U1.AE23 16.71,12.05 v1(16.69,12.05) 16.66,12.02 16.66,11.93 U1.AD22 ; 13.49,17.3 13.51,17.32 v1(13.58,17.32) ; U1.F10 5.79,13.8 v1(6.13,14.14) 6.48,14.49 U1.F12 ; U1.F10 U1.G10 ; U1.F10 5.46,13.46 v1(5.41,13.46) v1(5.78,13.1) ; U1.AA18 13.61,11 13.61,10.93 ; U1.AA18 U1.Y18 ; U1.AA18 14.21,11.02 v1(14.25,11.02) ; U1.AH32 21.25,13.78 v1(21.02,13.55) 20.78,13.78 20.63,13.78 ; v1(12.96,11.52) 12.94,11.5 12.7,11.5 U1.W16 ; v1(12.96,11.52) 12.43,12.04 v1(12.43,12.11) ; v1(12.96,11.52) 12.96,11.72 13.21,11.98 ; v1(12.96,11.52) 13.13,11.35 13.25,11.35 ; U1.AA15 U1.AB15 ; U1.AA15 U1.Y15 ; U1.AA15 U1.AA16 ; U1.AB15 13.54,10.22 v1(13.54,10.27) ; U1.AB15 U1.AB14 U1.AD14 ; U1.J10 U1.J9 ; U1.J10 6.87,12.72 v1(7.21,13.06) ; U1.J10 6.53,13.03 ; U1.J10 U1.K10 ; U1.J9 6.49,12.38 6.2,12.67 ; U1.J9 U1.K9 U1.K10 ; U1.J9 6.36,12.24 5.77,12.24 v1(5.76,12.25) ; v1(10.17,9.99) 10.37,10.19 v1(10.72,10.19) v1(11.08,10.55) ; v1(21.21,3.56) 21.21,3.8 20.15,4.86 v1(20.01,4.86) 20.01,5 v1(19.01,6) ; U1.Y18 13.25,11.98 13.21,11.98 ; U1.Y18 13.25,11.35 ; 7.91,13.78 v1(7.19,14.5) 7.21,14.5 U1.G14 ; 7.91,13.78 U1.J12 ; 7.91,13.78 U1.J13 U1.J12 ; v1(46,16.28) 45.78,16.06 CD20.2 ; U1.AK11 14.7,5.65 v1(15.01,5.97) U1.AL12 U1.AL13 U1.AL14 ; v1(12.26,8.34) 11.94,8.34 U1.AB11 U1.AB10 ; v1(12.26,8.34) 12.26,8.02 U1.AD11 ; v1(12.26,8.34) 12.6,8.34 v1(12.86,8.08) ; v1(12.26,8.34) 12.26,8.73 U1.AB12 ; 13.61,10.93 13.25,11.29 ; 13.61,10.93 13.54,10.93 U1.AA16 ; 13.61,10.93 13.61,10.91 U1.AB17 ; v1(14.25,11.02) 14.52,11.29 v1(14.69,11.29) ; v1(14.25,11.02) 14.25,10.93 U1.AB17 ; v1(12.86,8.08) 13.21,8.43 U1.AD13 U1.AD14 ; v1(12.86,8.08) 12.9,8.04 12.95,8.04 U1.AE12 ; v1(12.86,8.08) 12.81,8.04 12.77,8.04 U1.AD11 ; U1.N19 U1.N18 10.77,13.82 10.76,13.82 ; U1.N19 U1.P19 ; U1.N19 11.78,14.83 v1(11.78,14.86) v1(12.14,14.5) 12.14,14.48 U1.P19 ; U1.J6 5.47,11.31 v1(5.8,10.97) 6.14,10.64 U1.L6 6.14,10.56 v1(6.47,10.24) 6.81,9.89 U1.N6 6.85,9.83 v1(7.17,9.51) ; U1.AG3 10.65,3.88 v1(10.36,4.18) ; v1(18.26,12.06) 18.26,12.05 18.22,12.01 ; v1(18.26,12.06) 18.17,12.16 18.17,12.71 U1.AE26 U1.AE25 ; v1(18.26,12.06) 18.11,12.06 U1.AE25 ; 11.78,10.58 v1(11.76,10.56) U1.W13 11.09,9.89 ; 11.78,10.58 11.78,10.61 11.45,10.93 ; 11.78,10.58 U1.W15 ; v1(10.41,13.39) 10.72,13.08 U1.P16 ; v1(10.41,13.39) 10.41,13.46 10.76,13.82 ; v1(10.41,13.39) 10.34,13.39 U1.N15 9.32,13.08 U1.M13 ; 17.45,12.02 U1.AE25 ; 17.45,12.02 17.72,11.75 v1(17.72,11.58) ; U1.W27 v1(16.06,15.53) ; U1.W27 16.06,14.87 ; U1.W27 16.39,15.15 16.06,14.82 ; v1(16.06,15.53) 16.06,14.87 ; v1(16.06,15.53) U1.U27 15.68,15.95 v1(15.35,16.28) 15.31,16.28 U1.R27 14.64,16.95 v1(14.64,16.99) 14.6,16.99 U1.N27 ; 12.17,11.65 12.17,11.64 U1.W16 ; 12.17,11.65 12.16,11.65 v1(12.14,11.67) U1.U16 ; 12.17,11.65 11.84,11.32 11.84,11.3 v1(11.82,11.28) 11.81,11.27 11.79,11.27 11.45,10.93 ; 12.17,11.65 12.53,12.01 ; v1(12.85,3.86) 12.52,3.53 U1.AK5 ; U1.L30 14.7,19.09 v1(15.01,18.77) 15.33,18.45 U1.N30 ; U1.G10 v1(6.53,13.04) ; U1.G10 6.11,13.43 v1(5.78,13.1) ; 10.76,13.82 10.76,13.82 v1(10.4,14.19) ; v1(15.6,12.33) 15.56,12.33 v1(15.2,11.97) 14.98,12.19 U1.AA21 U1.AA22 ; v1(15.6,12.33) 15.6,12.46 U1.AA22 ; v1(15.6,12.33) 15.91,12.65 v1(16.03,12.65) v1(15.67,13.01) ; U1.AC29 U1.AE29 19.55,13.45 v1(19.55,13.42) 19.57,13.4 U1.AG28 19.57,12.52 v1(19.43,12.37) 19.57,12.22 U1.AH27 19.5,12.09 18.95,12.09 U1.AG25 18.22,11.96 18.22,12.01 ; v1(12.12,10.2) v1(12.49,9.83) ; U1.U16 11.8,12.13 12.05,12.39 ; U1.U16 U1.T16 ; U1.U16 v1(11.48,11.7) ; v1(12.43,12.11) 12.33,12.11 12.05,12.39 ; v1(12.43,12.11) 12.53,12.01 ; 7.53,12.74 U1.K11 v1(7.89,12.38) 7.91,12.37 ; 7.53,12.74 7.57,12.74 U1.K12 ; 7.53,12.74 7.53,12.74 ; U1.E3 2.89,11.66 v1(2.6,11.95) ; 7.91,12.37 8.26,12.02 8.26,12.01 ; 7.91,12.37 U1.L10 U1.K10 ; 7.91,12.37 U1.L12 ; U1.AE19 U1.AE18 v1(15.67,9.56) 16.05,9.94 ; U1.AE19 U1.AE20 ; U1.AE19 16,9.94 16.05,9.94 ; U1.AD14 U1.AE14 ; U1.AA22 15.6,12.99 15.65,12.99 v1(15.67,13.01) ; U1.AA22 U1.Y22 ; U1.T16 11.8,12.73 11.8,12.74 12.14,13.08 ; U1.T16 11.09,12.02 ; v1(11.76,2.79) 12.08,2.47 U1.AL3 ; 16.73,10.62 16.4,10.29 16.35,10.29 ; 16.73,10.62 16.73,10.62 U1.AE21 ; 16.73,10.62 17.05,10.94 v1(17.11,10.94) ; U1.U25 14.98,15.21 v1(14.67,15.53) 14.34,15.2 U1.T24 ; v1(12.42,7.14) 12.42,7.69 U1.AD11 ; v1(12.42,7.14) 11.87,7.14 U1.AD9 U1.AE9 12.42,6.98 v1(12.42,7.14) ; v1(12.42,7.14) 12.76,6.8 v1(12.79,6.8) ; v1(25.76,19.1) 25.65,19.2 21.23,19.2 v1(21.21,19.18) 19.33,17.3 v1(19.28,17.3) ; v1(28.07,9.75) 28.18,9.64 28.75,9.64 28.85,9.74 ; U1.N27 U1.N26 13.92,16.99 v1(13.58,17.32) ; U1.N27 13.94,17.65 v1(13.94,17.69) ; U1.AG7 U1.AH7 12.29,4.73 v1(12.29,4.5) ; 16.35,10.29 v1(16.35,10.24) 16.05,9.94 ; 16.35,10.29 U1.AE20 ; v1(15.67,13.01) 15.33,13.35 U1.Y23 U1.Y22 ; 7.91,9.54 8.87,10.5 8.87,10.7 8.62,10.95 ; 8.62,10.95 8.97,11.3 U1.P11 v1(9.32,11.66) ; 8.62,10.95 U1.N10 8.61,11.66 ; U1.A1 0.56,12.37 v1(0.18,11.99) ; 13.21,11.98 12.86,12.33 U1.V18 ; 8.61,11.66 8.62,11.66 U1.N12 ; 8.61,11.66 8.26,12.01 ; 6.17,12.67 v1(6.13,12.67) 6.13,12.74 v1(5.78,13.1) ; 6.17,12.67 6.2,12.67 ; 6.17,12.67 6.53,13.03 ; U1.AE20 U1.AE21 ; U1.AE20 U1.AD20 U1.AD21 ; U1.L12 U1.K12 ; U1.L12 8.61,12.37 ; U1.L12 8.61,13.08 ; U1.K12 U1.J12 ; 7.53,12.74 7.53,12.74 7.34,12.94 7.34,13.22 U1.J12 ; 7.53,12.74 7.53,12.7 U1.K10 ; U1.Y22 U1.W22 14.62,14.19 v1(14.9,14.47) ; v1(18.9,10.57) 18.84,10.57 U1.AJ23 18.51,10.19 v1(18.19,9.86) 17.87,9.54 U1.AJ21 17.48,9.22 v1(17.48,9.16) 17.42,9.16 U1.AJ19 ; U1.Y15 12.83,10.93 12.89,10.93 ; U1.Y15 U1.W15 ; 17.44,11.32 17.44,11.27 v1(17.11,10.94) ; 17.44,11.32 17.44,11.33 17.7,11.58 v1(17.72,11.58) ; v1(13.94,17.69) 13.6,18.03 U1.L27 12.86,18.03 U1.K26 ; v1(13.94,17.69) 14.29,18.05 v1(14.33,18.05) ; v1(13.94,17.69) 13.58,17.34 v1(13.58,17.32) ; v1(8.99,10.54) 8.99,10.62 U1.R11 9.64,11.28 v1(9.69,11.28) ; v1(17.72,11.58) 17.82,11.68 17.89,11.68 18.22,12.01 ; v1(9.32,11.66) 9.67,11.31 U1.R13 10.69,11.66 v1(10.75,11.61) ; v1(9.32,11.66) U1.N12 ; U1.V19 12.53,12.05 12.53,12.01 ; 16.06,14.87 16.06,14.82 ; 16.06,14.87 16.39,14.54 U1.Y26 ; 16.06,14.82 U1.Y26 ; 8.26,12.01 8.61,12.37 ; v1(5.78,13.1) 5.43,12.75 U1.G8 5.25,12.54 v1(5.08,12.54) ; U1.AN1 12.15,0.72 v1(12.03,0.6) ; 8.61,12.37 U1.N12 ; 8.61,12.37 U1.M13 ; U1.L13 8.61,13.08 ; 8.61,13.08 U1.M13 ; U1.P19 U1.R19 ; 13.92,15.93 U1.R24 U1.T24 ; 13.92,15.93 13.9,15.91 U1.P24 ; 13.92,15.93 v1(14,16.01) 13.94,15.94 13.92,15.93 ; 6.2,12.67 5.83,12.29 5.79,12.29 v1(5.76,12.25) ; U1.G3 3.35,11.27 v1(3.29,11.27) ; U1.AD21 U1.AE21 ; U1.AD21 U1.AD22 ; v1(35.46,16.18) 35.46,16.54 34.98,17.01 RD4.1 ; v1(5.76,12.25) 5.7,12.2 5.42,12.2 v1(5.08,12.54) ; v1(32.26,19.84) 31.75,19.33 26.86,19.33 v1(26.63,19.1) ; U1.AA16 12.89,10.92 12.89,10.93 ; U1.AA16 v1(13.54,10.27) ; U1.W16 U1.W15 ; U1.W16 12.51,11.31 12.89,10.93 ; U1.W15 11.52,11.59 11.52,11.66 v1(11.48,11.7) ; 13.25,11.35 13.25,11.29 ; U1.Y26 U1.AA26 16.94,13.94 v1(17.3,13.94) 17.3,13.58 17.45,13.43 ; 13.25,11.29 12.89,10.93 ; U1.AM5 v1(13.21,3.47) ; v1(45.34,11.25) 45.62,11.54 RD13.1 ; v1(5.08,12.54) 5.08,13.08 U1.F8 ; v1(5.08,12.54) 5.07,12.54 4.54,12.54 U1.F6 ; v1(9.01,8.53) 8.71,8.83 U1.U7 U1.R7 ; 6.53,13.03 v1(6.53,13.04) ; 6.53,13.03 v1(6.53,13.04) ; v1(13.59,18.76) 13.26,19.09 U1.J28 13.1,18.97 v1(12.58,18.97) ; U1.G29 12.77,20.15 v1(12.47,20.44) ; v1(15.25,14.83) 14.9,14.47 v1(14.9,14.47) ; v1(9.49,15.96) 9.19,16.26 U1.G18 ; 6.64,18.96 6.53,18.96 v1(6.44,19.05) ; 12.14,13.08 12.11,13.08 v1(11.73,12.71) 12.05,12.39 ; 12.14,13.08 U1.T18 ; 11.09,11.31 10.79,11.61 v1(10.75,11.61) ; 11.09,11.31 v1(11.48,11.7) ; 11.09,11.31 11.41,10.99 v1(11.41,10.95) 11.42,10.93 11.45,10.93 ; U1.AG11 13.6,6.71 v1(13.94,7.05) ; U1.T24 14.62,14.84 14.62,14.74 v1(14.9,14.47) ; 11.09,12.02 11.17,12.02 v1(11.48,11.7) ; 11.09,12.02 10.75,11.67 v1(10.75,11.61) ; v1(13.54,10.27) 13.59,10.27 U1.AB17 ; v1(17.14,16.65) 17.14,16.58 17.79,15.92 v1(17.84,15.92) 17.84,15.87 U1.AA30 ; v1(11.45,5.31) 11.8,4.97 U1.AG6 ; U1.AL9 14.36,4.59 v1(14.66,4.89) ; CD27.2 41.75,4.87 v1(41.75,5.28) 41.75,6.22 v1(41.37,6.6) 41.04,6.27 v1(41.04,5.23) CD22.2 ; v1(23.83,11.2) 24.1,11.2 24.66,11.76 25.22,11.76 25.83,12.37 26.75,12.37 27.99,11.13 27.99,11 v1(28.07,10.92) 28.1,10.95 28.16,10.95 ; U1.L33 16,20.15 ; U1.AN28 21.93,10.36 v1(22.11,10.36) ; 13.54,5.98 v1(13.59,5.98) 13.26,5.65 U1.AH9 ; v1(11.11,9.22) v1(11.48,8.86) ; U1.AC1 8.59,4.59 v1(8.24,4.24) ; v1(24.03,12.37) 23.46,12.37 U1.AN33 ; v1(15.36,7.04) 15.04,6.71 U1.AJ13
  TOP w0.33: v1(38.2,14.53) 38.23,14.51 UD2.K9
  TOP w0.381: 33.4,16.61 v1(33.4,16.23) ; 33.4,16.61 33,17.01 32.82,17.01 CD14.2 ; 33.4,16.61 33.4,16.63 33.78,17.01 RD11.2 ; v1(42.53,19.29) UD3.2 v1(40.64,19.29) ; v1(34.26,6.35) 34.26,7.17 UD2.E1 ; UD2.N1 41.23,6.6 v1(41.37,6.6) ; UD2.B2 UD2.A2 30.23,8.01 v1(30.18,7.95) ; UD2.G8 UD2.H9 36.63,14.12 v1(36.58,14.16) ; CD1.2 26.42,14.45 v1(26.42,13.31) ; v1(34.13,9.34) 34.23,9.25 UD2.E3 ; 30.21,13.17 30.58,12.81 UD2.A8 ; CD29.2 v1(38.84,19.13) ; UD2.E8 UD2.D8 UD2.C9 32.57,13.66 v1(32.57,14.15) ; v1(45.24,13.92) 45.64,13.51 RD7.1 ; UD2.K1 v1(38.23,6.38) 38.34,6.27 CD12.2 ; CD24.2 v1(43.39,20.67) ; UD2.D2 33.43,8.02 v1(33.03,8.41) ; CD25.2 v1(38.45,20.2) ; CD28.2 v1(44.76,19.19) ; UD2.F1 35.03,6.39 v1(34.99,6.36) 34.99,6.19 v1(34.3,5.5) 34.59,5.21 CD11.2 ; UD2.H1 v1(36.63,6.38)
  TOP w0.4: v1(43.66,7.08) 43.15,7.08 UD2.T1
  TOP w0.508: RD2.1 42.03,15.29 v1(41.04,14.3) ; CD17.2 29.3,12.89 29.93,12.89 30.21,13.17 30.21,13.17 v1(30.2,13.17) ; 38.23,16.32 38.23,15.9 38.38,15.75 v1(38.38,15.68) ; 38.23,16.32 38.93,16.32 39.12,16.13 RD14.1 ; 38.23,16.32 CD9.2 ; v1(45.42,16.46) 45.26,16.46 45.14,16.33 CD26.2 ; v1(43.66,7.08) 43.81,7.23 CD10.2
  L2GND w0.076: 37.97,10.95 37.94,10.71 37.8,10.46 ; 17.42,12.88 17.42,13.31
  L3 w0.076: v1(17.48,9.16) 17.48,8.68 18.14,8.03 18.14,6.88 v1(19.01,6)
  L3 w0.254: v1(24.22,21.71) v1(23.55,22.38) 21.69,20.52 v1(21.69,20.51) 20.66,19.48 v1(20.66,19.48) 17.84,16.67 v1(17.84,15.92) ; v1(23.22,3) 23.14,2.92 21.84,2.92 v1(21.21,3.56) 21.21,3.58 20.08,4.71 20.08,4.79 v1(20.01,4.86) 19.01,5.86 v1(19.01,6)
  L5GND w0.076: 17.45,12.9 17.42,13.44 ; 38,10.92 37.9,10.54
  L5GND w0.381: v1(17.84,15.92) 17.84,16.67 v1(20.66,19.48) 20.66,19.48 v1(21.69,20.51) 21.69,20.52 v1(23.55,22.38) v1(24.22,21.71) 24.72,21.71 27.17,19.27 27.17,6.95 v1(23.22,3) 23.29,2.92 23.49,2.92 ; 16.3,8.71 v1(19.01,6) 19.04,6 20.01,5.04 v1(20.01,4.86) 20.08,4.93 21.21,3.8 v1(21.21,3.56) 21.45,3.56 22.09,2.92
  L7GND w0.076: 17.42,12.88 17.42,13.26 ; 38,10.9 37.9,10.57
  BOTTOM w0.076: 31.57,16.13 31.79,15.91 32.39,15.91 32.46,15.98 32.61,15.98 ; 32.14,9.06 32.14,8.68 31.9,8.43 31.77,8.43 31.34,8.01 UD2.A2 ; 24.74,13.59 24.87,13.72 24.87,14.17 24.75,14.29 ; v1(23.07,15.85) 22.99,15.93 22.23,15.93 22.15,15.85 22.15,15.85 ; v1(36.6,3.28) 35.69,4.19 32.56,4.19 ; 25.93,12.8 25.91,12.8 25.57,13.14 25.57,13.45 25.65,13.54 25.65,14.53
  BOTTOM w0.102: 28.24,8.46 28.07,8.46 26.8,9.73 26.8,9.85 25.21,11.44 ; v1(21.5,17.29) 21.87,16.92 23.42,16.92 27.56,12.78 27.56,11.43 v1(28.07,10.92) 28.08,10.94 28.61,10.94 28.82,10.73 28.82,10.45 29.79,9.47 30.2,9.47 30.35,9.32 30.38,9.35 31,9.35 31.04,9.31 31.09,9.31 31.13,9.27 31.93,9.27 32.14,9.06 ; 29.06,8.18 29.95,8.18 30.18,7.95 ; v1(23.07,15.85) 24.63,14.28 24.67,14.28
  BOTTOM w0.127: v1(34.26,6.35) 33.89,6.73 33.89,7.67 UD1.E8
  BOTTOM w0.152: UD1.E3 33.81,11.59 v1(33.81,11.25) ; UD1.E8 34.62,7.61 34.62,6.94 34.99,6.57 v1(34.99,6.36)
  BOTTOM w0.254: 28.24,8.46 28.52,8.18 29.06,8.18 ; UD1.E8 UD2.D2 UD1.C9 ; v1(23.22,3) 23.88,3 v1(24.46,2.41) v1(27.58,2.41) v1(31.42,2.41) v1(34.95,2.41) ; RD1.1 41.46,5 v1(41.75,5.28) ; CD13.2 41.71,14.97 v1(41.04,14.3) 40.66,14.67 CD21.2 ; 37.36,2.69 37.69,3.02 37.69,3.38 37.26,3.81 36.73,3.81 36.6,3.68 ; v1(41.04,5.23) 40.52,4.71 RD15.1 ; RD12.1 45.39,9.21 v1(45.39,8.97) ; UD1.E3 34.23,12.24 33.82,12.64 33.82,12.65 33.67,12.81 UD2.D8 ; RD3.1 34.46,4.72 RD10.2 34.44,5.36 v1(34.3,5.5) ; 37.69,2.85 37.77,2.77 ; RD5.1 19.03,17.05 v1(19.28,17.3) ; UD2.A8 30.57,12.81 v1(30.2,13.17)
  BOTTOM w0.305: UD1.T1 43.98,13.61 v1(44.09,13.72) ; v1(38.23,6.38) 38.23,6.74
  BOTTOM w0.33: UD1.N1 40.63,13.89 v1(41.04,14.3) ; UD2.K9 38.23,14.51 v1(38.2,14.53)
  BOTTOM w0.381: UD1.B2 UD2.A8 ; v1(43.66,7.08) 43.71,7.13 CD16.2 ; v1(38.23,6.38) 38.27,6.33 CD19.2 ; v1(25.76,19.1) 25.76,19.41 25.79,19.44 CD7.2 ; UD1.F1 v1(35.03,14.23) ; CD6.2 v1(26.63,19.1) ; UD2.H9 36.63,14.12 v1(36.58,14.16) ; CD18.2 28.43,6.92 v1(28.11,6.6) ; UD1.G8 UD2.H1 v1(36.63,6.38) ; UD2.D8 UD1.E1 v1(34.23,14.21) ; UD2.A2 30.97,7.95 30.18,7.95 v1(30.18,7.95)
  BOTTOM w0.406: 38.23,6.74 UD2.K1
  BOTTOM w0.508: v1(38.38,15.68) 38.38,15.69 37.93,16.14 CD15.2
  vias: v1(12.86,10.9) v1(13.57,10.91) v1(20.64,6.13) v1(22.91,20.57) v1(22.94,6.5) v1(23.22,19.3) v1(23.42,19.79) v1(23.88,5.44) v1(24.08,20.88) v1(24.51,23.39) v1(25.07,8.91) v1(25.02,1.12) v1(25.5,23.32) v1(25.5,18.26) v1(25.93,0.1) v1(26.39,21.84) v1(27.23,18.39) v1(27.69,22.56) v1(27.66,1.07) v1(27.91,23.7) v1(28.07,19.96) v1(28.27,21.56) v1(28.65,18.54) v1(29.11,16.26) v1(29.36,0.2) v1(29.57,19.23) v1(29.74,18.57) v1(29.85,11.24) v1(30.05,20.52) v1(30.23,5.46) v1(30.4,23.01) v1(30.68,16.28) v1(30.76,18.52) v1(31.34,21.36) v1(31.45,1.19) v1(31.93,23.57) v1(32.61,0.2) v1(32.92,22.12) v1(33,9.71) v1(33.86,20.4) v1(33.88,19.15) v1(34.77,23.52) v1(34.8,1.09) v1(35.31,11.07) v1(35.28,9.79) v1(36.02,21.54) v1(36.12,19.28) v1(36.3,0.2) v1(36.8,10.57) v1(37.13,19.43) v1(37.62,23.65) v1(38.05,22.43) v1(38.2,20.98) v1(38.28,2.41) v1(38.4,1.4) v1(38.73,21.69) v1(39.98,23.49) v1(40.21,17.4) v1(40.51,0.25) v1(40.72,21.72) v1(41.71,2.41) v1(42.21,1.3) v1(42.42,21.39) v1(43.1,17.96) v1(43.46,19.41) v1(43.69,0.3) v1(44.09,23.72) v1(44.22,19.3) v1(44.98,21.56) v1(45.54,4.73) v1(45.64,2.41) v1(45.69,1.47) v1(45.87,21.39) v1(45.82,7.14) v1(46.08,23.47) v1(46.63,16.38) v1(46.99,17.09) v1(47.19,12.65) v1(47.19,8.51) v1(47.14,0.28) v1(47.29,19.61) v1(47.27,15.01) v1(47.25,6.44) v1(47.55,21.51) v1(47.85,18.03) v1(47.88,11.4) v1(47.96,7.24) v1(47.96,3.91) v1(48.11,9.88) v1(48.13,22.99) v1(48.34,19.25) v1(48.54,15.95) v1(48.54,14.91) v1(49.07,1.17) v1(49.28,21.39) v1(49.23,19.53) v1(49.3,17.48) v1(49.3,12.09) v1(49.23,10.21) v1(49.25,8) v1(49.3,6.63) v1(49.34,14.02) v1(49.38,3.15)
SBG1/GND: length 31.6
  TOP w0.114: RD14.2 39.81,15.81 39.81,13.62 UD2.M9 39.49,12.94 39.49,11.92 39.53,11.83 39.59,11.74 40.19,10.9 40.3,10.36 v1(40.3,10.1) ; RD16.2 24.47,8.6 24.69,8.81 v1(24.69,9.25)
  L6 w0.114: v1(40.3,10.1) 40.3,9.85 38.49,8.05 31.24,8.05 30.97,8.32 27.3,8.32 26.24,9.37 24.92,9.37 24.8,9.25 v1(24.69,9.25)
  BOTTOM w0.114: RD15.2 39.75,4.85 39.75,7.13 UD1.M9 39.95,7.09 40.14,7.09 40.28,7.23 40.28,7.51 40.17,7.62 39.56,7.62 39.42,7.76 39.42,9.12 40.3,9.99 v1(40.3,10.1)
VCC25-DRAM: length 68.9
  TOP w0.254: 42.19,6.03 42.67,5.55 42.67,5.51
  TOP w0.381: v1(42.16,6.07) 42.19,6.03 42.19,5.99 42.67,5.51 v1(42.67,5.41) 42.84,5.24 CD27.1 ; v1(33.35,5.45) 33.35,4.32 34.2,3.47 34.92,3.47 35.61,2.78 37.39,2.78 37.86,3.25 v1(42.98,3.25) ; UD2.B1 31.83,6.39 v1(31.87,6.34) ; 42.55,13.93 UD2.R9
  TOP w0.508: RD8.2 46.31,19.2 v1(46.53,18.97) 46.53,17.78 46.15,17.4 43.81,17.4 43.23,16.82 CD26.1 43.23,15.09 42.55,14.4 42.55,13.93 ; v1(32.03,16.28) 32.03,16.21 31.89,16.07 v1(31.89,14.18)
  BOTTOM w0.254: v1(42.16,6.07) 42.23,6.14 UD1.R9
  BOTTOM w0.381: UD1.B1 31.83,14.11 31.89,14.17 v1(31.89,14.18) ; v1(33.35,5.45) 32.71,5.45 32.01,6.16 32.01,6.21 v1(31.87,6.34) ; v1(42.16,6.07) 42.67,5.55 v1(42.67,5.41) 42.77,5.41 42.98,5.2 v1(42.98,3.25) 48.69,8.97 48.69,11.46 47.93,12.22 47.93,16.87 46.53,18.26 v1(46.53,18.97) ; v1(32.03,16.28) 32.05,16.31 32.05,16.87 33.73,18.54
  BOTTOM w0.508: 33.73,18.54 46.1,18.54 v1(46.53,18.97)
VCC-DRAM: length 86.7
  TOP w0.203: U1.AC24 v1(17.07,13.05)
  TOP w0.254: 16.71,13.41 16.71,13.39 U1.AB24 ; 16.71,13.41 v1(17.07,13.05) ; 16.71,13.41 v1(16.71,13.41) 16.71,13.41 16.32,13.8 ; U1.W24 U1.W23 ; U1.W24 U1.W25 16.02,14.15 ; U1.W24 U1.Y24 ; U1.AA24 U1.AB24 ; U1.AA24 16.32,13.71 16.32,13.8 ; U1.AA24 U1.Y24 ; U1.AB24 U1.AC24 ; U1.Y24 16.02,14.12 16.02,14.15 ; U1.AC24 v1(17.14,12.33) ; U1.AC24 U1.AC22 15.69,11.66 v1(15.65,11.66) 15.65,11.63 U1.AC20 U1.AC19 ; 16.02,14.15 16.32,13.86 v1(16.32,13.83) 16.32,13.8 ; U1.AC18 14.93,10.3 v1(14.97,10.3) ; U1.AC18 U1.AC19 ; U1.AC18 U1.AC17 14.61,9.91 v1(14.62,9.91) 14.62,9.95 v1(14.97,10.3) ; v1(14.97,10.3) 15.31,10.64 v1(15.34,10.64) 15.03,10.96 U1.AC19
  TOP w0.381: v1(32.5,6.37) 32.5,6.01 31.75,5.26 CD8.1 31.03,5.27 v1(31.03,6.45) UD2.A1 ; v1(32.5,6.37) 32.5,7.08 UD2.C1 UD2.D1 33.43,6.43 v1(33.57,6.29) 32.58,6.29 v1(32.5,6.37) ; UD2.J8 UD2.J9 v1(37.43,14.15) 37.43,14.64 37.31,14.76 37.31,15.58 ; CD11.1 35.44,5.9 v1(35.87,6.33) 35.83,6.37 UD2.G1 35.41,7.62 35.41,7.65 ; UD2.L9 39.03,14.32 v1(39.14,14.44) 38.47,15.11 37.77,15.11 37.31,15.58 ; UD2.L1 39.03,6.49 39.17,6.35 ; CD14.1 32.79,15.64 33.1,15.33 v1(33.1,14.16) 33.1,13.93 UD2.D9 ; 37.31,15.58 37.31,15.97 ; UD2.J2 UD2.J1 37.43,6.45 v1(37.42,6.45) ; CD12.1 39.03,4.78 39.03,6.21 39.17,6.35 ; v1(31.78,9.6) 31.83,9.56 UD2.B3 ; CD1.1 24.53,14.5 v1(24.53,13.95) ; 39.17,6.35 v1(39.2,6.32) ; UD2.G9 v1(35.83,14.2) 35.83,14.49 37.31,15.97 ; 35.41,7.65 35.06,8.01 UD2.F2 ; 35.41,7.65 v1(35.42,7.65) ; CD9.1 37.31,15.97 ; RD6.2 44.75,14.51 v1(44.55,14.71) 44.13,14.71 UD2.T9 ; UD2.G7 35.83,12.01 v1(35.43,12.4) 35.03,12.81 UD2.F8 ; UD2.B9 UD2.A9 31.03,13.98 31.2,14.16
  TOP w0.4: UD2.R1 42.75,6.68 42.75,6.68 ; 42.75,6.68 42.75,6.63 v1(42.69,6.63) ; 42.75,6.68 42.88,6.55 42.88,6.55 42.98,6.45 v1(43.59,6.45)
  TOP w0.508: CD17.1 29.14,14.16 31.2,14.16 v1(31.24,14.2) ; CD10.1 43.66,6.38 v1(43.59,6.45)
  L3 w0.076: 37.95,10.57 37.95,11.2
  BOTTOM w0.254: v1(41.88,14.04) 41.88,14.06 42.56,14.75 CD13.1 43.96,14.71 v1(44.55,14.71)
  BOTTOM w0.305: v1(39.14,14.44) 39.03,14.32 UD2.L9
  BOTTOM w0.381: UD2.A1 30.91,7.09 CD18.1 ; UD2.A1 v1(31.03,6.45) ; UD2.A1 UD1.B9 ; UD2.J8 UD2.J9 v1(37.43,14.15) ; 35.41,7.65 35.41,7.65 35.38,7.65 UD2.F2 UD1.G7 ; 35.41,7.65 v1(35.42,7.65) ; 35.41,7.65 35.41,7.62 UD2.G1 35.83,6.37 v1(35.87,6.33) 35.87,6.28 CD19.1 37.42,6.45 v1(37.42,6.45) 37.43,6.45 UD2.J1 UD2.J2 ; v1(33.57,6.29) 33.43,6.43 UD2.D1 ; UD1.C1 UD2.D9 33.1,13.93 v1(33.1,14.16) ; v1(31.24,14.2) 31.03,13.98 UD2.A9 ; UD2.L1 39.03,6.49 v1(39.2,6.32) ; UD1.R1 42.23,13.7 v1(41.88,14.04) ; v1(35.43,12.4) 35.03,12.81 UD2.F8 ; v1(31.51,11.52) 31.51,11.69 UD1.B3 ; UD2.G9 v1(35.83,14.2) ; CD16.1 43.76,6.28 v1(43.59,6.45)
  BOTTOM w0.406: UD1.T9 43.03,7.01 v1(43.59,6.45)
  BOTTOM w0.508: CD15.1 39.14,15.99 v1(39.14,14.44)
VDD18-DRAM: length 13
  TOP w0.254: v1(17.78,13.02) 17.75,13.02 17.45,12.72
  L6 w0.254: v1(17.78,13.02) 18.4,13.02
  L6 w0.305: 24.36,19.87 24.36,18.98 18.4,13.02
  L6 w0.381: 24.36,19.87 v1(25.07,20.57)
  BOTTOM w0.381: v1(25.07,20.57) 25.29,20.79 CD7.1 26.62,20.79 CD6.1
717-BLDO2: length 2.9
  TOP w0.381: v1(39.69,19.3) CD29.1 39.69,18.34 UD3.3
PS: length 2.3
  TOP w0.381: v1(40.05,20.91) CD25.1 40.08,20.24 UD3.1
SA0: length 33.2
  TOP w0.076: v1(21.7,12.74) 22.05,12.4 U1.AL31
  TOP w0.114: v1(44.23,10.1) 44.23,10.23 44.12,10.35 43.96,10.35 43.84,10.23 43.84,9.76 43.65,9.56 42.63,9.56 41.82,9.23 41.43,8.84 UD2.P3
  L4 w0.114: v1(21.7,12.74) 21.82,12.62 23.77,12.62 23.97,12.82 25.01,12.82 25.43,12.4 30.55,12.4 30.84,12.12 31.42,12.12 32.11,11.43 32.11,10.82 32.78,10.16 36.25,10.16 36.7,9.7 37.35,9.7 37.96,9.09 43.23,9.09 v1(44.23,10.1)
  BOTTOM w0.114: v1(44.23,10.1) 44.23,10.46 44.16,10.84 43.99,11.01 43.68,11.17 43.2,11.29 42.73,11.29 42.54,11.48 42.01,11.48 41.55,11.94 41.47,12.01 UD1.P3
SA1: length 32.7
  TOP w0.076: U1.AJ31 21.7,13.08 21.95,13.33 22.15,13.33 22.3,13.18 22.51,13.18 22.78,13.45
  TOP w0.114: v1(23.15,13.29) 22.98,13.45 22.78,13.45 ; v1(43.81,10.71) 43.52,11 UD2.P7
  L6 w0.114: v1(43.81,10.71) 43.81,11.19 43.1,11.89 42.2,11.89 38.78,15.31 38.78,15.31 38.12,15.31 37.64,15.79 25.9,15.79 23.86,13.75 23.61,13.75 v1(23.15,13.29)
  BOTTOM w0.114: UD1.P7 41.76,9.14 42.39,9.14 42.67,9.42 43.56,9.42 43.81,9.68 v1(43.81,10.71)
SA2: length 34
  TOP w0.114: v1(45.38,10.71) 45.38,10.12 45.32,9.93 45.22,9.82 44.2,9.16 43,9.16 UD2.R3 ; U1.AK33 22.62,13.65 24.01,13.65 v1(24.12,13.53)
  L4 w0.114: v1(24.12,13.53) 24.6,13.53 25.19,14.13 29.81,14.13 31.06,12.88 31.86,12.88 32.8,11.94 32.8,11.11 33.17,10.73 36.32,10.73 36.81,11.22 37.2,11.22 37.49,11.51 44.59,11.51 v1(45.38,10.71)
  BOTTOM w0.114: UD1.R3 42.31,12.09 42.47,12.09 42.89,11.67 43.16,11.67 43.35,11.86 44.23,11.86 v1(45.38,10.71)
SA3: length 31.5
  TOP w0.102: 20.63,10.96 20.9,11.22 v1(20.99,11.22)
  TOP w0.114: UD2.N7 41.44,11.19 v1(42.24,10.71)
  L6 w0.114: v1(20.99,11.22) 21.49,10.72 22.26,10.72 27.12,5.86 32.14,5.86 32.18,5.89 38.26,5.89 42.24,9.87 v1(42.24,10.71)
  BOTTOM w0.114: v1(42.24,10.71) 42.24,9.77 42.08,9.61 41.43,9.61 UD1.N7
SA4: length 34
  TOP w0.114: U1.AH25 18.87,11.41 v1(19.14,11.69) ; v1(42.66,10.1) 42.29,9.91 41.96,9.76 41.45,9.63 UD2.N3
  L6 w0.114: v1(19.14,11.69) 19.29,11.69 20.01,12.41 20.8,12.41 21.47,13.08 21.84,13.08 21.97,12.95 24.02,12.95 24.64,13.57 24.64,13.58 25.13,14.07 25.13,14.24 26.12,15.22 37.62,15.22 37.95,14.9 38.36,14.9 38.73,14.52 38.73,14.34 41.95,11.13 42.37,11.13 42.66,10.83 v1(42.66,10.1)
  BOTTOM w0.114: v1(42.66,10.1) 42.66,10.76 42.37,11.05 41.9,11.05 41.47,11.48 41.15,11.48 UD1.N3
SA5: length 44.9
  TOP w0.114: U1.AJ25 19.22,11.01 v1(19.52,11.31) ; v1(46.17,10.71) 46.17,11.8 45.84,12.14 45.17,12.37 41.33,12.37 41.17,12.53 41.17,12.69 41.28,12.81 UD2.P8
  L4 w0.114: v1(19.52,11.31) 19.52,11.68 20.24,12.4 20.57,12.4 21.26,13.08 22.68,13.08 22.81,12.95 23.8,12.95 24.04,13.2 25.16,13.2 25.61,12.74 30.7,12.74 30.97,12.47 31.65,12.47 32.45,11.67 32.45,10.97 32.92,10.5 36.39,10.5 36.86,10.03 37.44,10.03 37.77,9.7 42.06,9.7 42.24,9.88 42.24,10.21 42.62,10.59 42.62,10.87 42.85,11.1 44.69,11.1 45.05,10.74 45.05,10.57 45.25,10.37 45.6,10.37 45.94,10.71 v1(46.17,10.71)
  BOTTOM w0.114: v1(46.17,10.71) 46.17,10.16 46.1,9.49 46.04,9.16 45.82,8.82 45.63,8.63 43.15,8.41 42.6,8.41 42.01,8.32 UD1.P8
SA6: length 39
  TOP w0.114: UD2.P2 41.9,8.95 42.08,9.13 42.67,9.37 42.67,9.37 44.04,9.37 44.77,10.1 v1(45.02,10.1) ; U1.AN26 20.99,9.84 21.77,9.06 v1(22.12,9.06)
  L6 w0.114: v1(22.12,9.06) 26.92,4.25 34.85,4.25 35.13,4.54 39.24,4.54 40.87,6.17 41.45,6.17 45.02,9.74 v1(45.02,10.1)
  BOTTOM w0.114: v1(45.02,10.1) 45.02,10.76 44.31,11.48 42.81,11.48 42.62,11.67 42.09,11.67 41.89,11.87 41.89,12.34 UD1.P2
SA7: length 44.3
  TOP w0.076: v1(22.79,14.4) 22.46,14.07 21.98,14.07 21.7,13.78 U1.AJ32
  TOP w0.114: UD2.R8 42.88,13.14 43.48,13.14 45.36,12.97 46.11,12.64 46.65,12.1 46.92,11.71 v1(47.47,10.73)
  L6 w0.114: v1(22.79,14.4) 22.79,15.09 25.6,17.9 37.08,17.9 38.91,17.62 39.95,17.08 43.61,14.67 43.84,14.48 47.47,10.86 v1(47.47,10.73)
  BOTTOM w0.114: UD1.R8 42.4,7.83 42.95,7.67 44.96,7.67 46.26,8.3 46.82,8.86 47.3,9.74 v1(47.47,10.73)
SA8: length 42
  TOP w0.114: U1.AL25 19.93,10.27 v1(20.26,10.6) ; v1(45.81,10.1) 44.45,8.74 43.82,8.74 43.46,8.38 42.6,8.38 UD2.R2
  L6 w0.114: v1(45.81,10.1) 45.52,9.82 45.52,9.63 43.3,7.41 43.3,6.7 42.31,5.7 41,5.7 39.42,4.12 35.31,4.12 35.02,3.84 26.75,3.84 20.26,10.32 v1(20.26,10.6)
  BOTTOM w0.114: v1(45.81,10.1) 45.81,11.27 44.6,12.47 42.56,12.47 UD1.R2
SA9: length 35.4
  TOP w0.114: U1.AG29 20.23,12.77 v1(20.28,12.77) ; UD2.R7 42.76,11.77 42.9,11.63 43.91,11.4 v1(44.6,10.71)
  L6 w0.076: 21.43,13.46 20.74,12.77 v1(20.28,12.77)
  L6 w0.114: 21.43,13.46 21.6,13.63 23.14,13.63 26.16,16.64 36.82,16.64 37.24,16.23 38.59,16.23 42.27,12.55 43.04,12.55 44.6,10.99 v1(44.6,10.71)
  BOTTOM w0.114: v1(44.6,10.71) 44.6,9.99 43.75,9.14 42.8,9.14 42.46,8.81 UD1.R7
SA10: length 28.3
  TOP w0.114: v1(41.08,10.1) 39.83,8.84 UD2.M3 ; U1.AK29 20.99,12.07 21.26,12.34 v1(21.28,12.4)
  L6 w0.114: v1(21.28,12.4) 21.29,12.41 21.84,12.41 22.09,12.65 23.96,12.65 24.01,12.71 24.36,12.71 25.06,13.4 25.06,13.4 25.55,13.9 25.55,14.06 26.08,14.59 37.5,14.59 37.91,14.17 38.17,14.17 41.05,11.29 41.05,10.14 v1(41.08,10.1)
  BOTTOM w0.114: UD1.M3 39.83,11.71 40.4,11.14 40.73,11.14 41.07,10.8 41.07,10.11 v1(41.08,10.1)
SA11: length 39.1
  TOP w0.114: v1(46.6,10.1) 45.73,8.83 45.53,8.62 44.79,8.36 43.9,8.1 UD2.T2 ; U1.AJ33 22.11,13.84 22.86,13.84 v1(23.5,14.48)
  L6 w0.114: v1(46.6,10.1) 46.6,10.83 46.25,11.18 45.89,11.18 45.41,11.66 44.72,11.66 42.7,13.68 41.73,13.68 41.52,13.89 41.52,14.33 41.19,14.66 40.75,14.66 38.76,16.65 37.5,16.65 37.1,17.05 37.01,17.06 25.99,17.06 23.5,14.57 v1(23.5,14.48)
  BOTTOM w0.114: UD1.T2 44.66,12.81 46.6,10.88 v1(46.6,10.1)
SA12: length 26.3
  TOP w0.114: UD2.M7 v1(40.66,10.71) ; v1(25.91,13.31) 25.44,13.31 25.32,13.42 25.32,13.59 25.33,13.59 25.41,13.67 25.82,13.67 25.93,13.79 25.93,14.04 25.82,14.15 25.07,14.15 24.95,14.04 24.95,13.67 24.33,13.06 23.89,13.06 23.64,12.8 23.19,12.8 U1.AM33
  L6 w0.114: v1(25.91,13.31) 25.91,13.6 26.02,13.72 26.28,13.72 26.37,13.8 26.37,14.03 26.48,14.15 26.79,14.15 26.79,14.15 27.14,14.15 30.51,14.15 30.9,13.75 37.99,13.75 40.66,11.09 v1(40.66,10.71)
  BOTTOM w0.114: UD1.M7 40.66,9.64 v1(40.66,10.71)
SA13: length 42.1
  TOP w0.114: UD2.T8 44.6,12.73 45.55,12.56 45.94,12.4 46.44,11.9 v1(46.96,10.71) ; U1.AG30 20.55,13.16 v1(20.68,13.16)
  L6 w0.114: v1(46.96,10.71) 46.96,10.75 45.64,12.06 44.39,12.99 39.57,16.78 38.45,17.26 37.05,17.48 25.81,17.48 23.16,14.83 23.16,14.28 22.83,13.94 20.94,13.94 20.68,13.69 v1(20.68,13.16)
  BOTTOM w0.114: v1(46.96,10.71) 46.96,9.78 46.47,9.08 45.8,8.41 44.98,8.13 43.15,8.13 UD1.T8
SACT: length 28.6
  TOP w0.114: v1(21.66,12.06) 21.34,11.74 U1.AL29 ; v1(39.51,10.1) UD2.L3
  L6 w0.114: v1(21.66,12.06) 22.04,12.06 22.28,12.29 23.75,12.29 24.01,12.03 24.29,12.03 24.55,12.03 24.59,11.99 24.97,11.99 25.42,12.45 30.62,12.45 31.09,12.92 37.65,12.92 39.51,11.05 39.51,10.63 39.09,10.21 39.09,9.83 38.13,8.87 38.13,8.71 38.25,8.59 38.41,8.59 39.63,9.81 39.63,9.98 v1(39.51,10.1)
  BOTTOM w0.114: v1(39.51,10.1) 39.51,11.52 UD1.L3
